# Altium PCB uarttors485_1.PcbDoc
Units mil, origin at the board's own origin, x right, y up, seen from the top; angles counter-clockwise.
Board outline 2165.35 x 1732.28 mil, 2 copper layers (Top Layer, Bottom Layer); 15 components, 10 nets, 44 pads, 0 vias.
Unrouted connection lines stored in the file: 1.
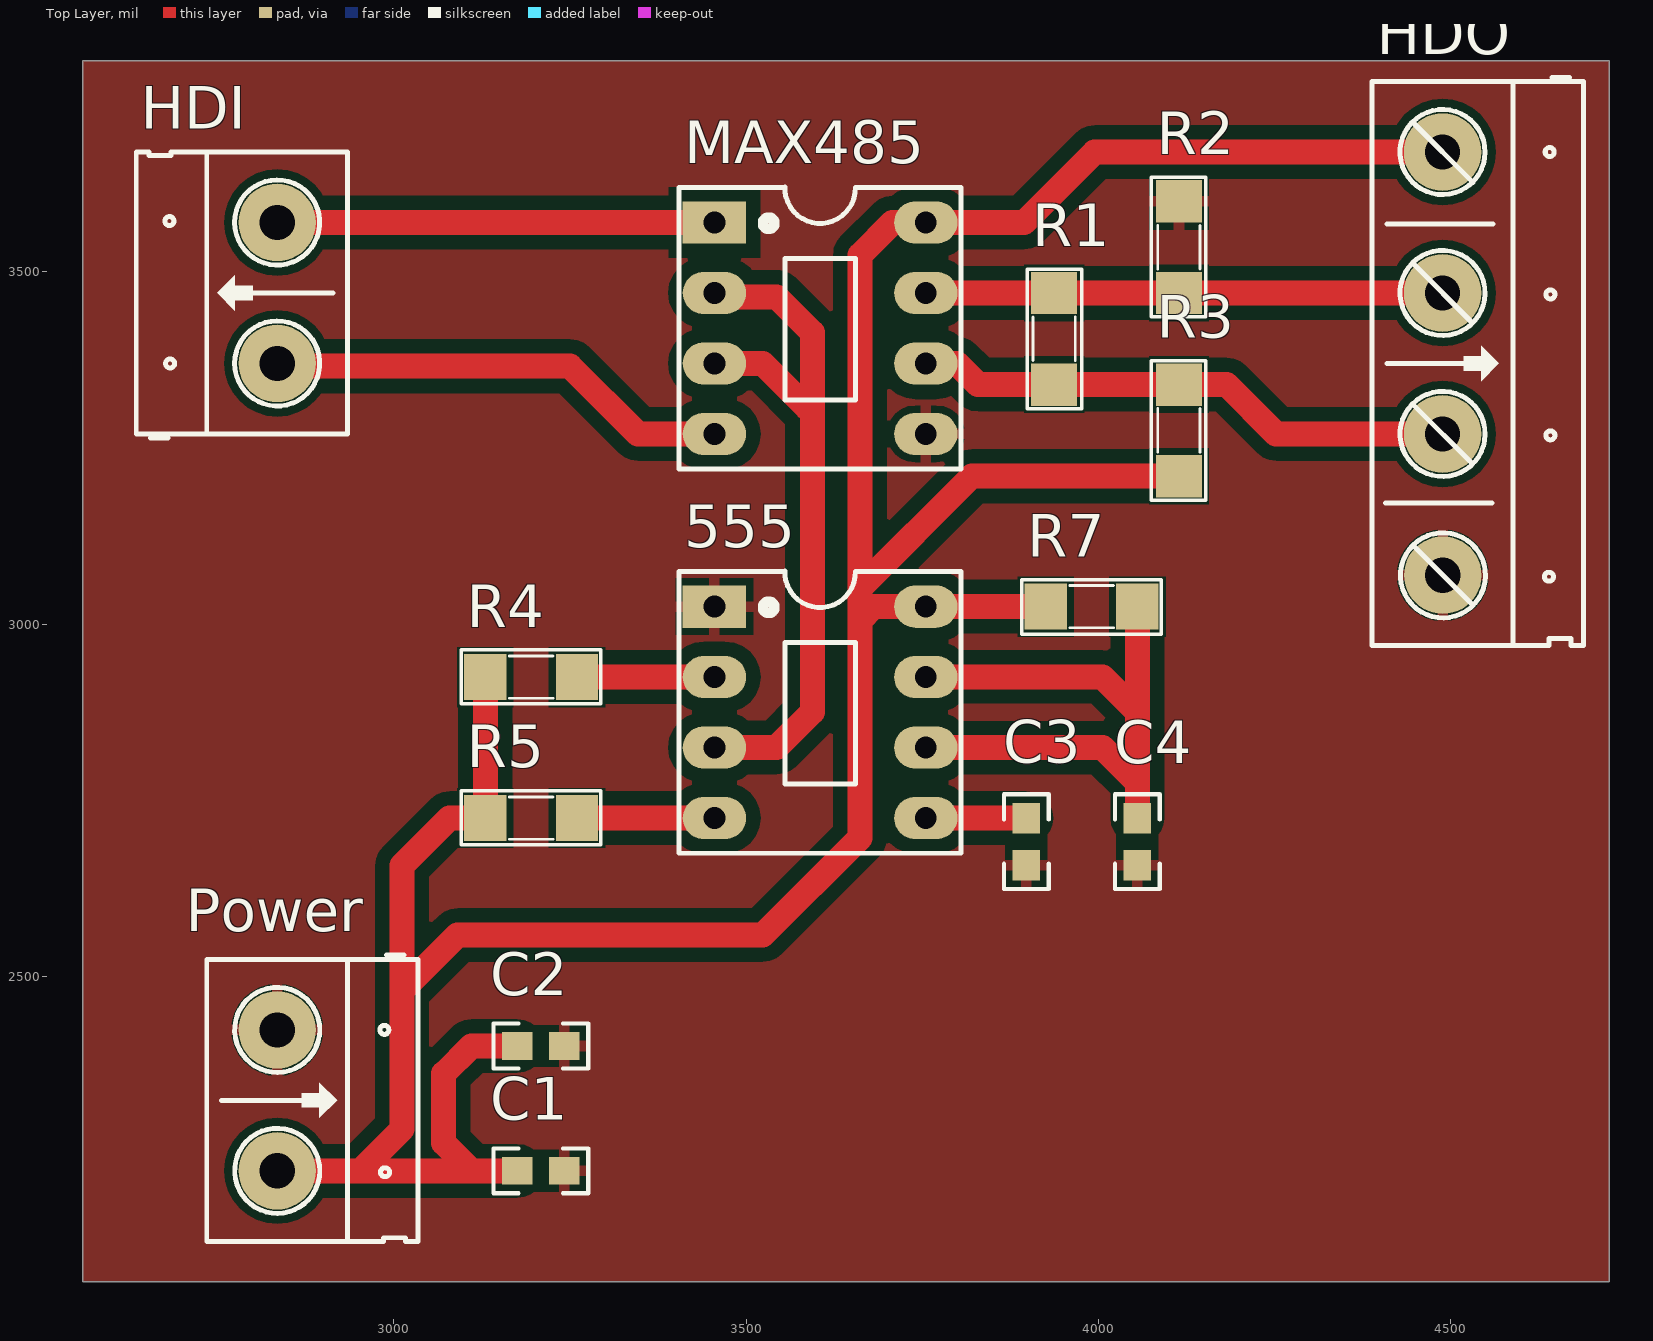
[diagram p0: Top Layer view]
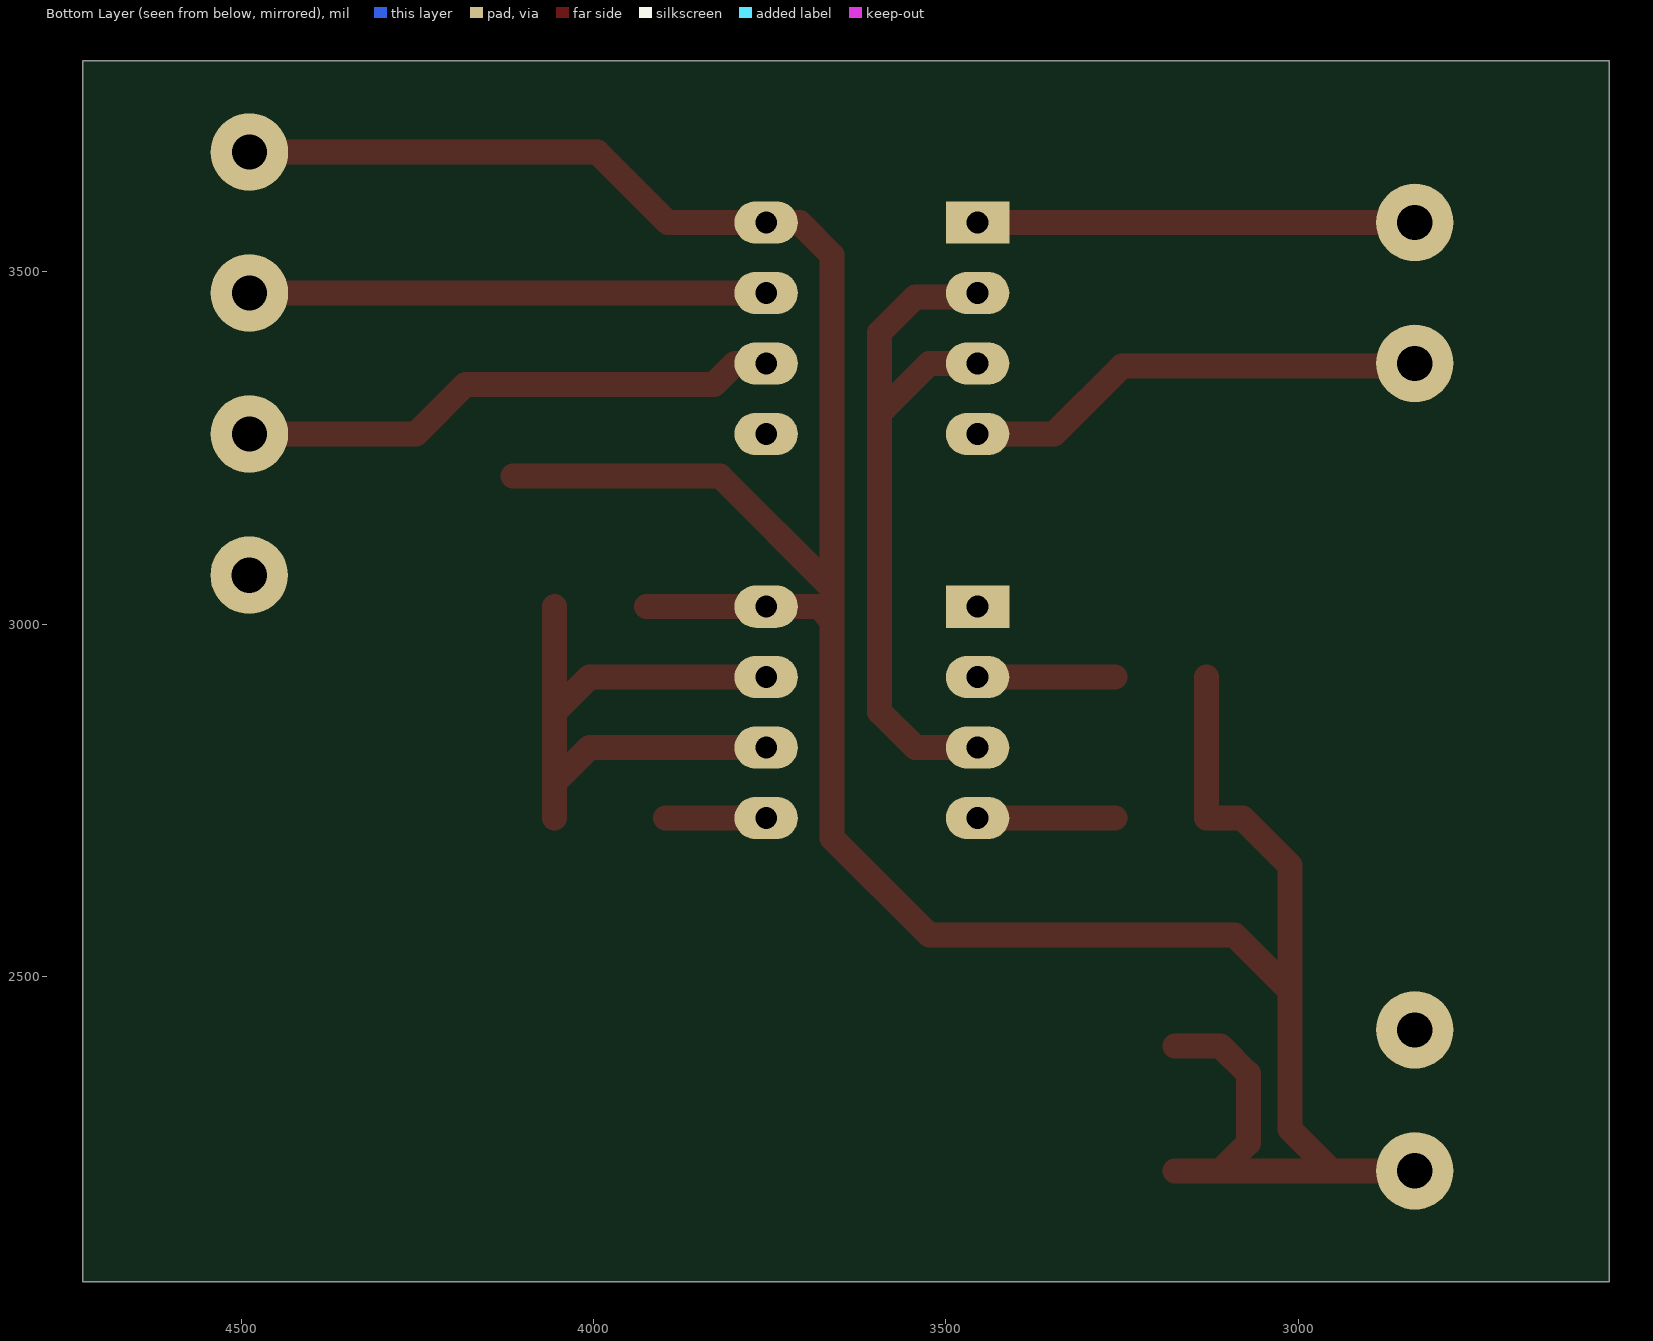
[diagram p1: Bottom Layer view, seen from below]
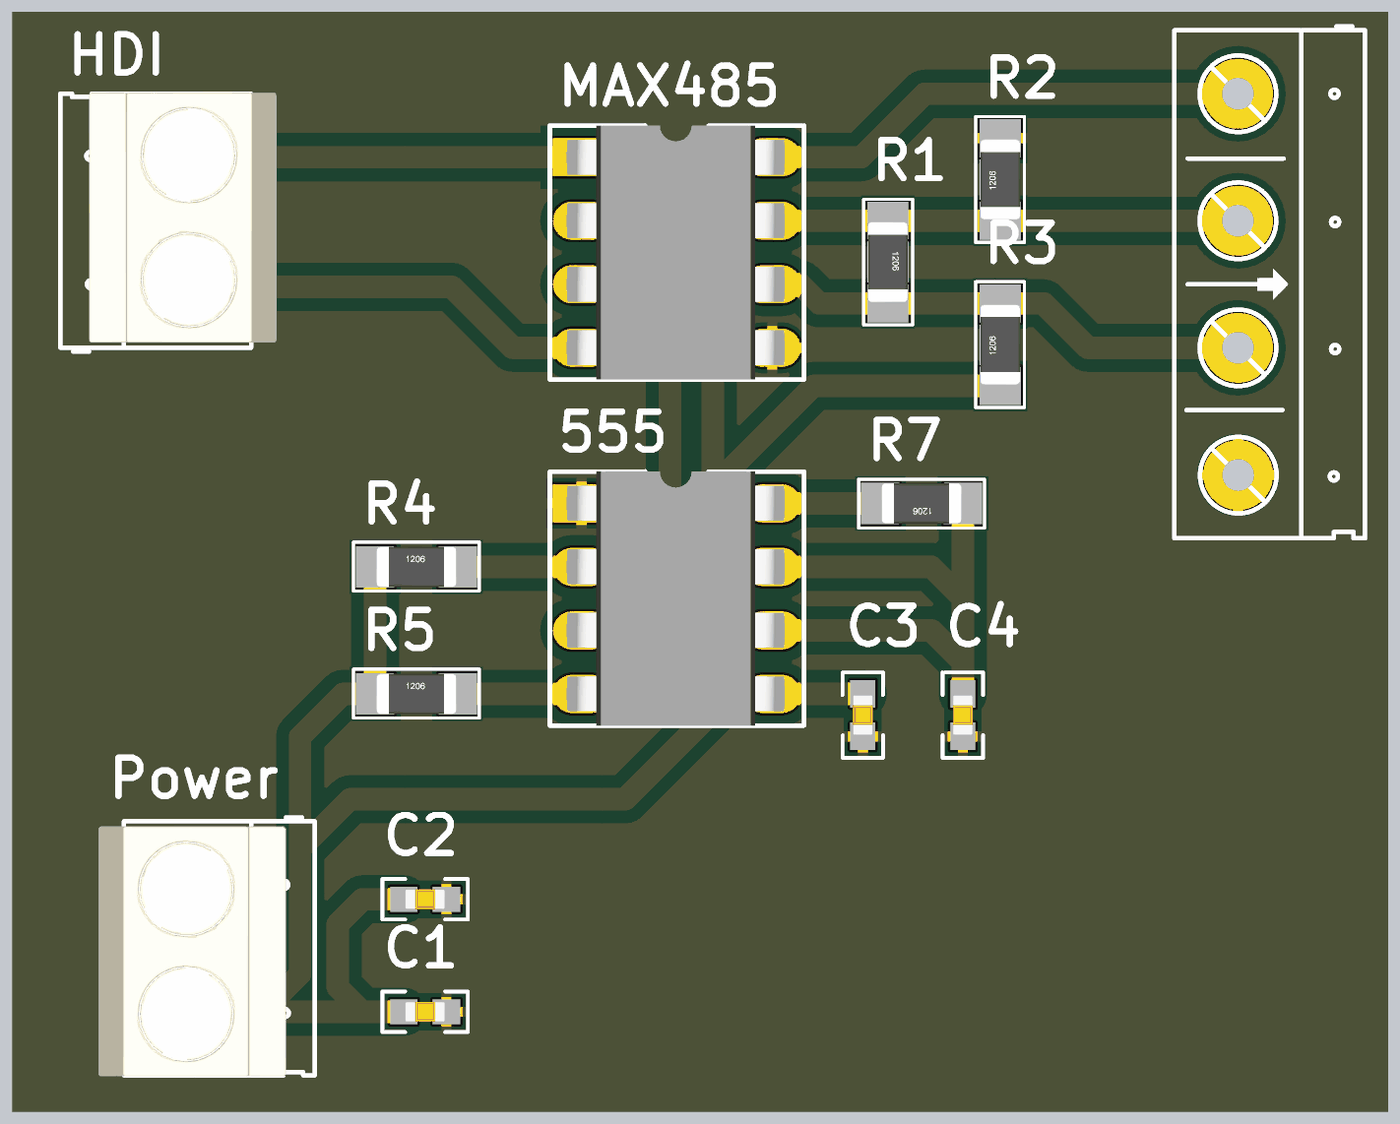
[diagram p2: 3D render of the assembled board from above, using the file's embedded part models]

## Layer stack, top to bottom
Top Solder: solder mask 0.4, Solder Resist, Dk 3.5
Top Layer: signal copper 1.4
Dielectric 1: dielectric 12.6, FR-4, Dk 4.8
Bottom Layer: signal copper 1.4
Bottom Solder: solder mask 0.4, Solder Resist, Dk 3.5

## Board outline
2559.06,3799.21 4724.41,3799.21 4724.41,2066.93 2559.06,2066.93

## Design rules (kind name [scope] priority, off if disabled: settings)
Clearance Clearance_1 [InNamedPolygon('Top Layer-No Net')] p1: gap=10 ignorepadtopadclearanceinfootprint=FALSE except(0: Arc-Hole Track-Hole SMDPad-Hole THPad-Hole Via-Hole Fill-Hole Poly-Hole Region-Hole Text-Hole; 20: Arc-Fill Arc-Poly Arc-Region Track-Fill Track-Poly Track-Region THPad-Fill THPad-Poly THPad-Region)
Clearance [All] p2: gap=10 ignorepadtopadclearanceinfootprint=FALSE except(0: Arc-Hole Track-Hole SMDPad-Hole THPad-Hole Via-Hole Fill-Hole Poly-Hole Region-Hole Text-Hole)
PolygonConnect PolygonConnect_2 [All vs IsNamedPolygon('Top Layer-No Net')] p1: connectstyle=Relief reliefconductorwidth=15.75 reliefentries=4 polygonreliefangle="90 Angle" airgapwidth=10
PolygonConnect PolygonConnect_1 [All vs IsNamedPolygon('Top Layer-No Net')] p2: connectstyle=Relief reliefconductorwidth=15.75 reliefentries=4 polygonreliefangle="90 Angle" airgapwidth=19.68
PolygonConnect [All] p3: connectstyle=Relief reliefconductorwidth=10 reliefentries=4 polygonreliefangle="90 Angle" airgapwidth=10
RoutingVias [All] p1: holewidth=28 width=50 viastyle="Through Hole" minholewidth=28 minwidth=50 maxholewidth=28 maxwidth=50
SolderMaskExpansion [All] p1: expansion=4
Width [All] p1: maxlimit=43.31 minlimit=35.43 preferedwidth=39.37
30 further rules are at their usual default settings.

## Classes and differential pairs
component class uartto485: 555 C3 C4 HDI HDO MAX485 R1 R2 R3 R4 R5 R7
component class power: C1 C2 Power

## Components (designator, comment, footprint, x,y, rotation, side; value= is the part's Value field where it differs from the comment)
555 "LM555" DIP8/W0.3 3455,3025 r270 top
C1 "22uF" "CAPC-0603 (1608)" 3208.66,2224.41 r180 top value=33p/50V
C2 "22uF" "CAPC-0603 (1608)" 3208.66,2401.57 r180 top value=33p/50V
C3 "10uF" "CAPC-0603 (1608)" 3897.64,2691.54 r90 top value=33p/50V
C4 "0.01uF" "CAPC-0603 (1608)" 4055.12,2691.54 r90 top value=33p/50V
HDI "Header 2_1" HED2 2834.65,3370.06 r90 top value="Header 2"
HDO "Header 4" HED4 4488.19,3670 r270 top
MAX485 "MAX485" DIP8/W0.3 3455,3570 r270 top
Power "Header 2_1" HED2 2834.65,2424.41 r270 top value="Header 2"
R1 "120" SM-RES-1206 3937.01,3470 r270 top value="R1/4W - 1K"
R2 "20k" SM-RES-1206 4114.17,3470 r90 top value="R1/4W - 1K"
R3 "20k" SM-RES-1206 4114.17,3210 r90 top value="R1/4W - 1K"
R4 "10k" SM-RES-1206 3129.92,2925 r0 top value="R1/4W - 1K"
R5 "1k" SM-RES-1206 3129.92,2725 r0 top value="R1/4W - 1K"
R7 "6.8k" SM-RES-1206 4055.12,3025 r180 top value="R1/4W - 1K"

## Footprints (in the part's own frame and the unit in brackets; to place one, negate y for a bottom-side part, rotate by r counter-clockwise, add the part's x,y. Pads: shape width x height; smd on the part's side, far side on the other; paste and mask are expansions set on the pad)
"CAPC-0603 (1608)" [mm] "Resistor, Chip; 1.60 mm L X 0.80 mm W X 0.50 mm H body"
  rect 1.1x1 smd mask+0.1: 1(-0.85,0) 2(0.85,0)
  silkscreen extent -1.71,-0.81 1.71,0.81, body extent -0.8,-0.4 0.8,0.4, height 0.6
DIP8/W0.3 [mil] "8 PIN, W 300mil, Pin to pin 100mil"
  rect 60x90 hole 31: 1(0,0)
  oval 60x90 hole 31: 2(100,0) 3(200,0) 4(300,0) 5(300,300) 6(200,300) 7(100,300) 8(0,300)
  silkscreen extent -50,-50 350,350, body extent -50,-40 350,336, height 201
HED2 [mil] "Header 2, 2 pin, hight 300mil, Pin to Pin 200, Colour Green"
  round 110 hole 50: 1(0,0) 2(200,0)
  silkscreen extent -106,-100 300,200, body extent -92,-140 302,155, height 394
HED4 [mil] "Header 4, 4 pin, hight 300mil, Pin to Pin 200, Colour Green"
  round 110 hole 50: 1(0,0) 2(200,0) 3(400.06,0.06) 4(600.39,0.39)
  silkscreen extent -106,-100 700,200
SM-RES-1206 [mil]
  rect 60x65 smd: 1(0,0) 2(130,0)
  silkscreen extent -34,-38 164,39, body extent 2,-31 128,32, height 40

## Part data
555: "Timer"
C1 C2 C3 C4: library part 0603N330J500CT, "CAP CER 33pF 50V 5%  0603", MPN="CL10C330JB8NNNC, 0603N330J500CT", Category=CAPACITOR, CompanyID=VT-01106, PinCount=2, Solder=SMT
HDI Power: "Header, 2-Pin", Manufacturer="Generic Components", Class=Connector
HDO: library part Hed4, "Header 4 (Green)"
MAX485: "RS232 - RS485 (Same sn75176)"
R1 R2 R3 R4 R5 R7: library part R, "Resistor 1/4W"

## Nets (pads, with @x,y where several pads share a name; then routed paths per layer and width w, separated by ;. In a path a pad name is that pad's centre, name@x,y a point inside that pad or via, vN(x,y) a via of type N, cw(c..) or ccw(c..) an arc to the next point about the centre after c; other vN are vias at no path point)
GND: 555.1 C1.1 C2.1 C3.1 C4.1 HDO.4 MAX485.5 Power.1 R2.2
Net555_2: 555.2 HDI.1 MAX485.4 R4.2 | length 856.9
  Top Layer w35.43: HDI.1 2838.57,3366.14 3250.32,3366.14 3346.46,3270 MAX485.4 ; R4.2 555.2
Net555_3: 555.3 MAX485.2 MAX485.3 | length 1025.3
  Top Layer w35.43: 555.3 3543.31,2825 3593.9,2875.59 3593.9,3307.09 ; MAX485.3 3523.62,3370 3586.54,3307.09 3593.9,3307.09 ; MAX485.2 3460.43,3464.57 3543.31,3464.57 3593.9,3413.98 3593.9,3307.09
Net555_4: 555.4 R5.2 | length 195.1
  Top Layer w35.43: R5.2 555.4
Net555_5: 555.5 C3.2 | length 142.6
  Top Layer w35.43: 555.5 C3.2
Net555_6: 555.6 555.7 C4.2 R7.1 | length 941.2
  Top Layer w35.43: 555.6 4005.71,2825 4055.12,2775.59 ; 555.7 4005.71,2925 4055.12,2875.59 ; C4.2 4055.12,2775.59 ; R7.1 4055.12,2875.59 ; 4055.12,2775.59 4055.12,2875.59
NetHDI_2: HDI.2 MAX485.1 | length 620.4
  Top Layer w35.43: HDI.2 3454.94,3570.06 MAX485.1
NetHDO_2: HDO.2 MAX485.7 R1.1 R2.1 | length 733.2
  Top Layer w35.43: MAX485.7 R1.1 R2.1 HDO.2
NetHDO_3: HDO.3 MAX485.6 R1.2 R3.2 | length 774.7
  Top Layer w35.43: MAX485.6 3799.15,3370 3829.15,3340 R1.2 R3.2 4181.97,3340 4252.03,3269.94 HDO.3
VCC: 555.8 C1.2 C2.2 HDO.1 MAX485.8 Power.2 R3.1 R4.1 R5.1 R7.2 | length 4662.7
  Top Layer w35.43: Power.2 2952.76,2224.41 ; R4.1 R5.1 3079.33,2725 3011.81,2657.48 3011.81,2480.32 ; C1.2 3110.24,2224.41 ; C2.2 3110.24,2401.57 3070.87,2362.2 3070.87,2263.78 3110.24,2224.41 ; R7.2 555.8 3681.1,3025 3661.42,3005.31 ; R3.1 3820.17,3210 3661.42,3051.24 ; HDO.1 3994.61,3670 3894.61,3570 MAX485.8 3707.8,3570 3661.42,3523.62 3661.42,3051.24 ; 2952.76,2224.41 3110.24,2224.41 ; 2952.76,2224.41 3011.81,2283.46 3011.81,2480.32 ; 3011.81,2480.32 3090.55,2559.06 3523.62,2559.06 3661.42,2696.85 3661.42,3005.31 ; 3661.42,3005.31 3661.42,3051.24

## Polygon pours and split planes (outlines as drawn)
GND on Top Layer "Top Layer-No Net" (solid, pour order 4): 2559.06,3799.21 4724.41,3799.21 4724.41,2066.93 2559.06,2066.93